# Altium PCB Simple_LED.PcbDoc
Units mil, origin at the board's own origin, x right, y up, seen from the top; angles counter-clockwise.
Board outline 1191.03 x 1386.03 mil, 2 copper layers (Top Layer, Bottom Layer); 4 components, 4 nets, 10 pads, 0 vias.
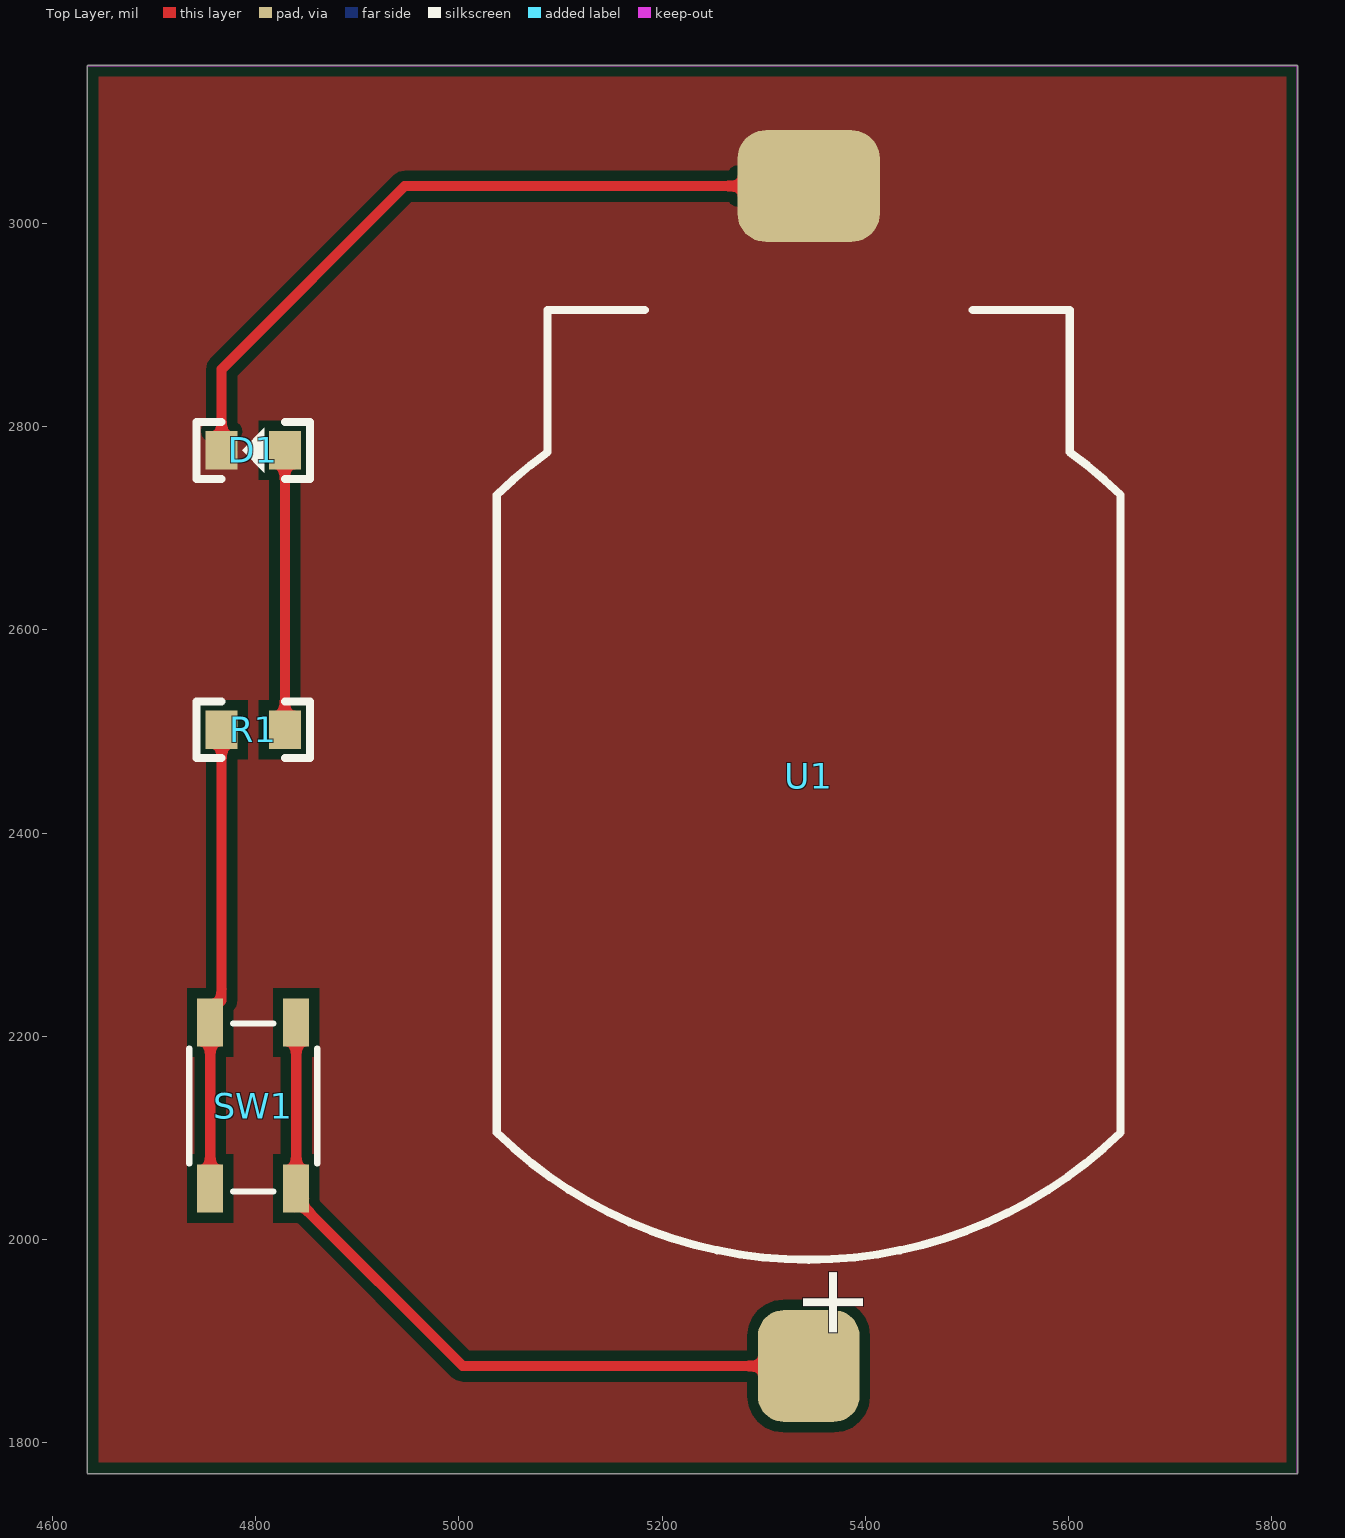
[diagram p0: Top Layer view]
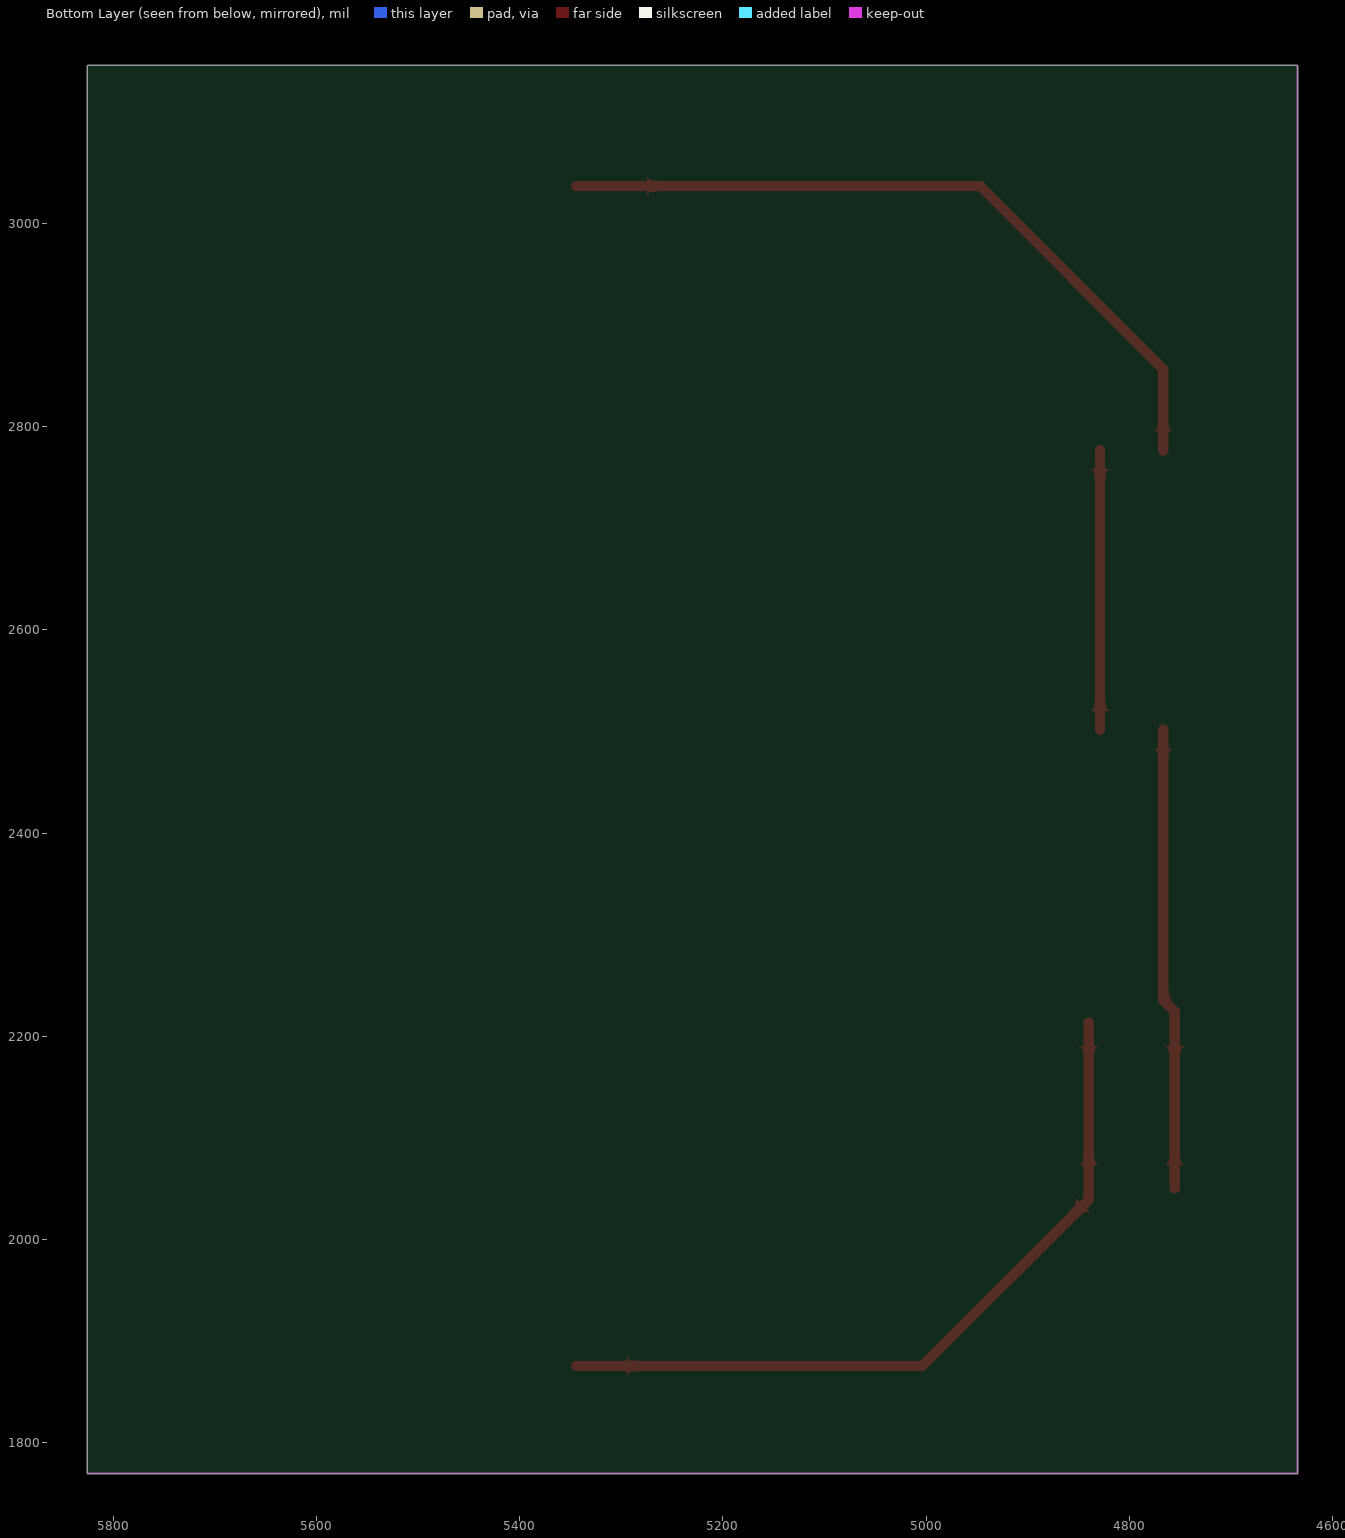
[diagram p1: Bottom Layer view, seen from below]
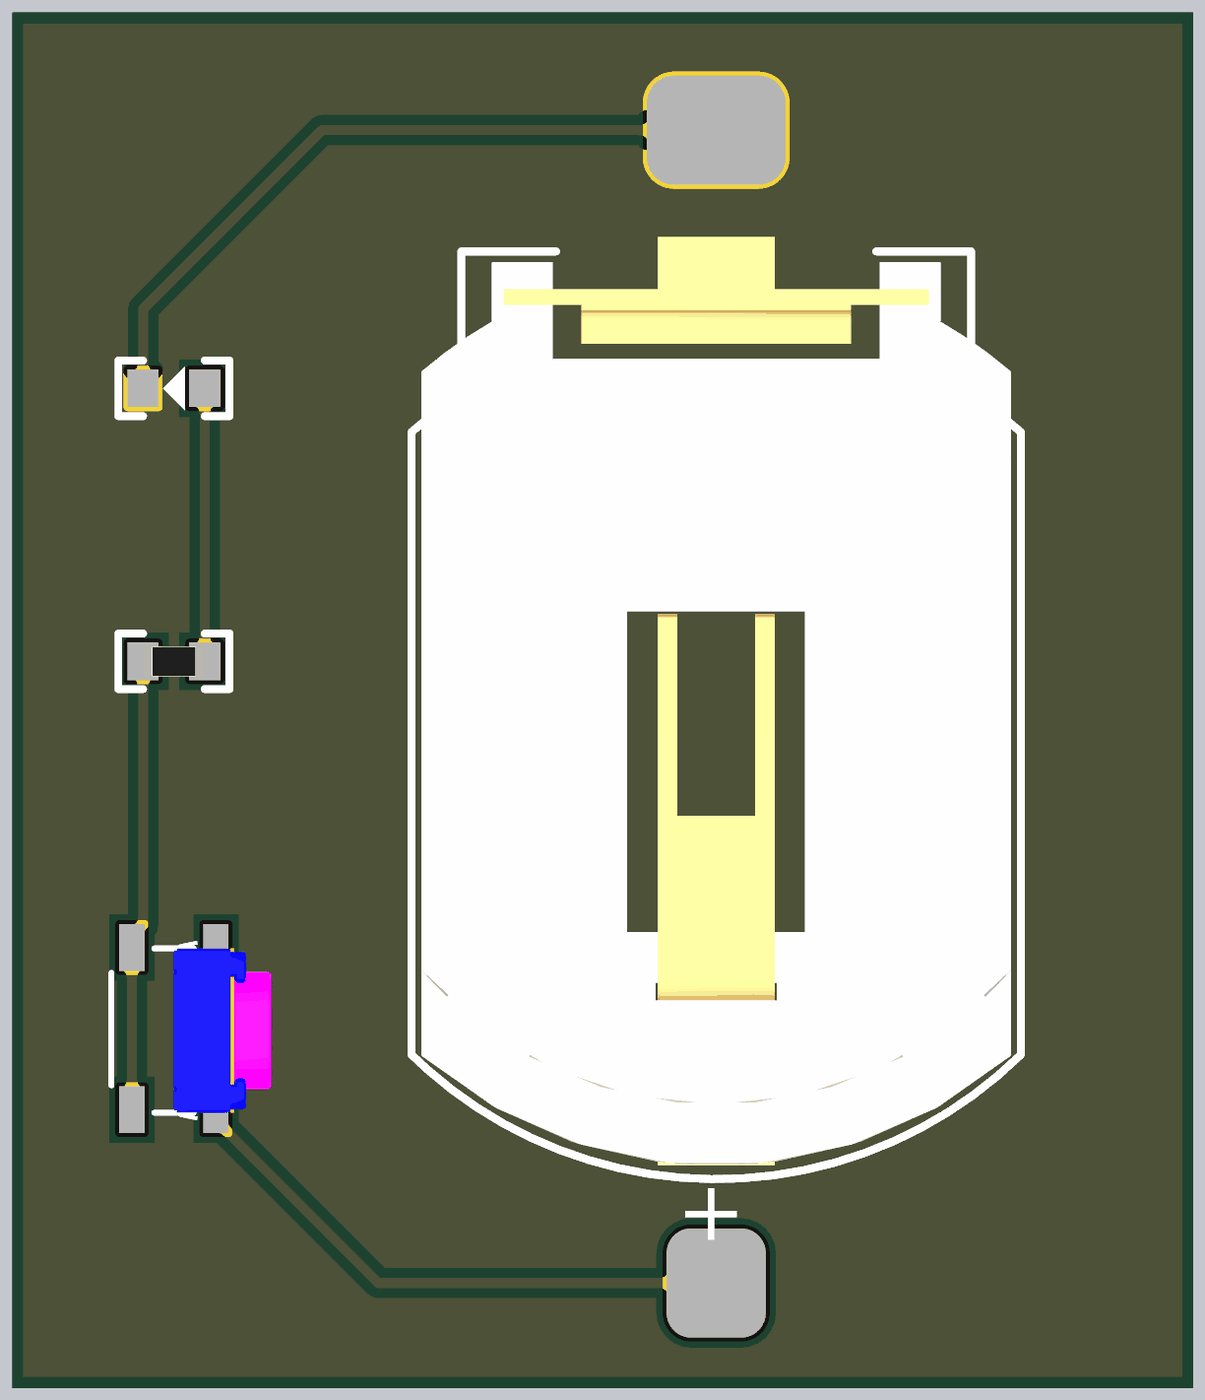
[diagram p2: 3D render of the assembled board from above, using the file's embedded part models]

## Layer stack, top to bottom
Top Solder: solder mask 0.4, Solder Resist, Dk 3.5
Top Layer: signal copper 1.4
Dielectric 1: dielectric 12.6, FR-4, Dk 4.8
Bottom Layer: signal copper 1.4
Bottom Solder: solder mask 0.4, Solder Resist, Dk 3.5

## Board outline
4634.48,1770 ccw(c4635,1770) 4635,1769.48 5825,1769.48 ccw(c5825,1770) 5825.52,1770 5825.52,3155 ccw(c5825,3155) 5825,3155.51 4635,3155.51 ccw(c4635,3155) 4634.48,3155

## Design rules (kind name [scope] priority, off if disabled: settings)
Clearance [All] p1: gap=10 ignorepadtopadclearanceinfootprint=FALSE except(0: Arc-Hole Track-Hole SMDPad-Hole THPad-Hole Via-Hole Fill-Hole Poly-Hole Region-Hole Text-Hole)
PolygonConnect [All] p1: connectstyle=Direct reliefconductorwidth=10 reliefentries=4 polygonreliefangle="90 Angle" airgapwidth=10
RoutingVias [All] p1: holewidth=28 width=50 viastyle="Through Hole" minholewidth=28 minwidth=50 maxholewidth=28 maxwidth=50
SolderMaskExpansion [All] p1: expansion=4 istentingtop=FALSE
Width [All] p1: maxlimit=10 minlimit=10 preferedwidth=10
30 further rules are at their usual default settings.

## Components (designator, comment, footprint, x,y, rotation, side; value= is the part's Value field where it differs from the comment)
D1 "RED" LED-0603 4797.68,2776.69 r180 top
R1 "1R" R-0603 4797.68,2501.69 r180 top
SW1 "KEY" KEY-4P-4.2*3.4*2.5 4797.68,2131.69 r90 top
U1 "CR2302" CR2032-1 5344.37,2899.02 r90 top

## Footprints (in the part's own frame and the unit in brackets; to place one, negate y for a bottom-side part, rotate by r counter-clockwise, add the part's x,y. Pads: shape width x height; smd on the part's side, far side on the other; paste and mask are expansions set on the pad)
CR2032-1 [mil]
  rrect50% 110x100 smd: 1(-1023.62,0)
  rrect50% 110x140 smd: 2(137.8,0)
  silkscreen extent -919,-307 16,307, body extent -905,-297 30,297, height 191
KEY-4P-4.2*3.4*2.5 [mm] "SKRPABE010"
  rect 1.2x0.65 smd: 1(-2.075,1.075) 1(2.075,1.075) 2(-2.075,-1.075) 2(2.075,-1.075)
  silkscreen extent -2.15,-1.6 2.05,1.6, body extent -2.35,-1.6 2.25,1.6, height 2.5
LED-0603 [mm]
  rect 0.8x0.96 smd: 1(-0.79,0) 2(0.79,0)
  silkscreen extent -1.42,-0.71 1.42,0.71, body extent -0.81,-0.4 0.81,0.4, height 0.6
R-0603 [mm]
  rect 0.8x0.96 smd: 1(-0.79,0) 2(0.79,0)
  silkscreen extent -1.42,-0.71 1.42,0.71, body extent -0.76,-0.38 0.76,0.38, height 0.41

## Part data
D1: library part LED, "发光二极管", Package=0603, SuppliersPartNumber=C2290, ComponentLink1Description=供应商链接, ComponentLink1URL=http://www.szlcsc.com/product/details_2663.html, Supplier=LC
R1: library part RES, "贴片电阻", Package=0805, SuppliersPartNumber=C17798, Supplier=LC
SW1: "按键开关"
U1: library part BAT, "锂电池", Manufacturer_Name="Keystone Electronics", Manufacturer_Part_Number=1026, Mouser Part Number=534-1026, RS Part Number=1142133, Allied Price/Stock=http://www.alliedelec.com/keystone-electronics-1026/70182086/, Allied_Number=70182086, Datasheet Link=http://www.keyelco.com/product-pdf.cfm?p=721, Mouser Price/Stock=https://www.mouser.com/Search/Refine.aspx?Keyword=534-1026, RS Price/Stock=http://uk.rs-online.com/web/p/products/1142133

## Nets (pads, with @x,y where several pads share a name; then routed paths per layer and width w, separated by ;. In a path a pad name is that pad's centre, name@x,y a point inside that pad or via, vN(x,y) a via of type N, cw(c..) or ccw(c..) an arc to the next point about the centre after c; other vN are vias at no path point)
3V: SW1.2 U1.1 | length 746.4
  Top Layer w10: SW1.2@4840,2213.39 4840,2050 4840,2039.17 5003.78,1875.39 U1.1
GND: D1.2 U1.2 | length 732.3
  Top Layer w10: D1.2 4766.57,2856.57 4946.81,3036.81 U1.2
NetD1_A: D1.1 R1.1 | length 275
  Top Layer w10: R1.1 D1.1
NetR1_2: R1.2 SW1.1 | length 456.3
  Top Layer w10: SW1.1@4755.35,2050 4755.35,2213.39 4755.35,2224.21 4766.57,2235.43 R1.2

## Polygon pours and split planes (outlines as drawn)
GND on Top Layer "NONET_L02_P-001" (solid, remove dead copper, pour order 0): 4535,3185 4535,1745 5915,1745 5915,3185

## Keep-outs
Keep-Out Layer:
  lines w1: 4635,1770 4635,3155 5825,3155 5825,1770 4635,1770

## Silkscreen, mask and mechanical layers (free items; w line width, h text height)
Mechanical 1:
  lines w1: 4635,1770 5825,1770 5825,3155 4635,3155 4635,1770

## Text inside footprints (layer, text, board x,y; h text height)
U1: Top Overlay "+" at 5316.36,1977.6 h118.11 r270